# Altium PCB STM32F4.PcbDoc
Units mm, origin at the board's own origin, x right, y up, seen from the top; angles counter-clockwise.
Board outline 80 x 65 mm, 2 copper layers (Top Layer, Bottom Layer); 79 components, 119 nets, 448 pads, 136 vias.
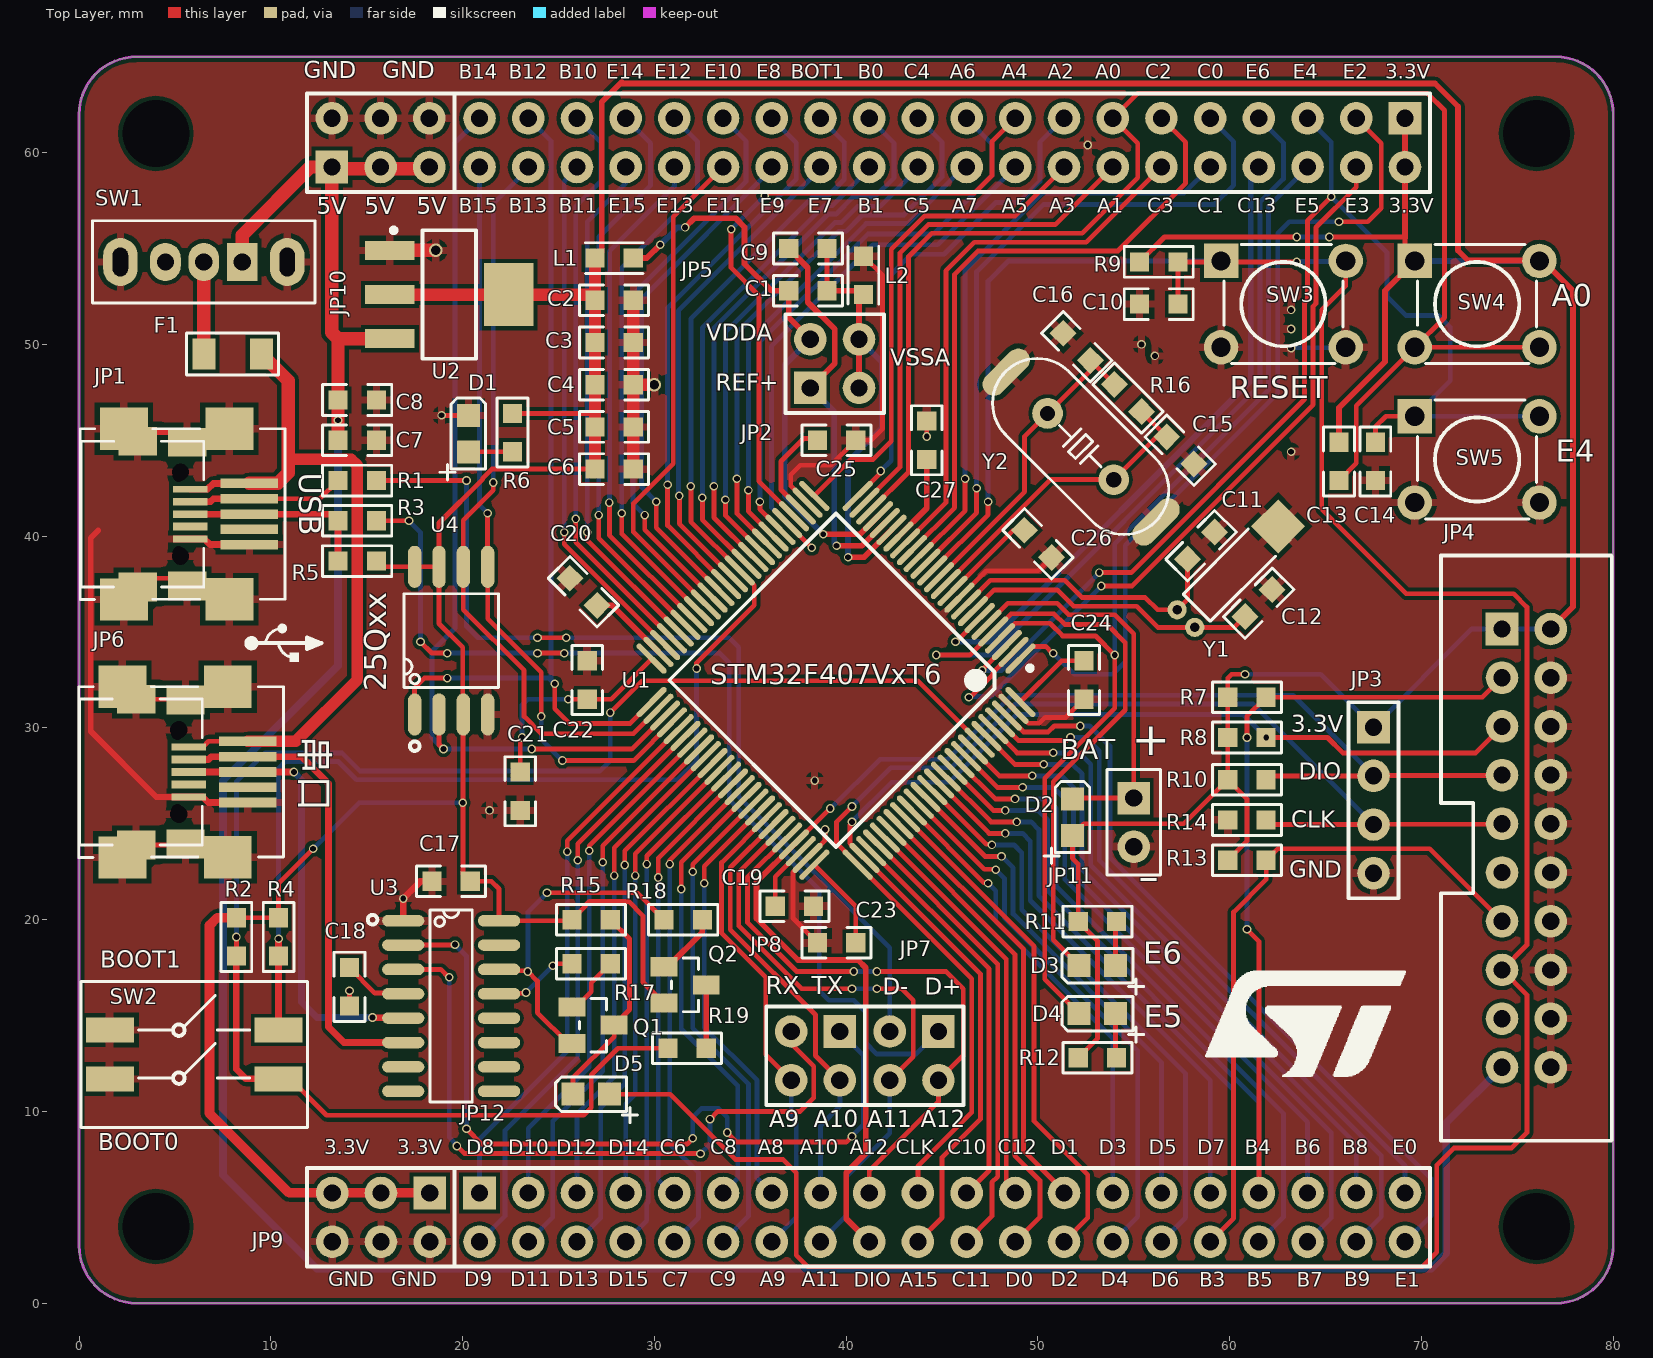
[diagram p0: Top Layer view]
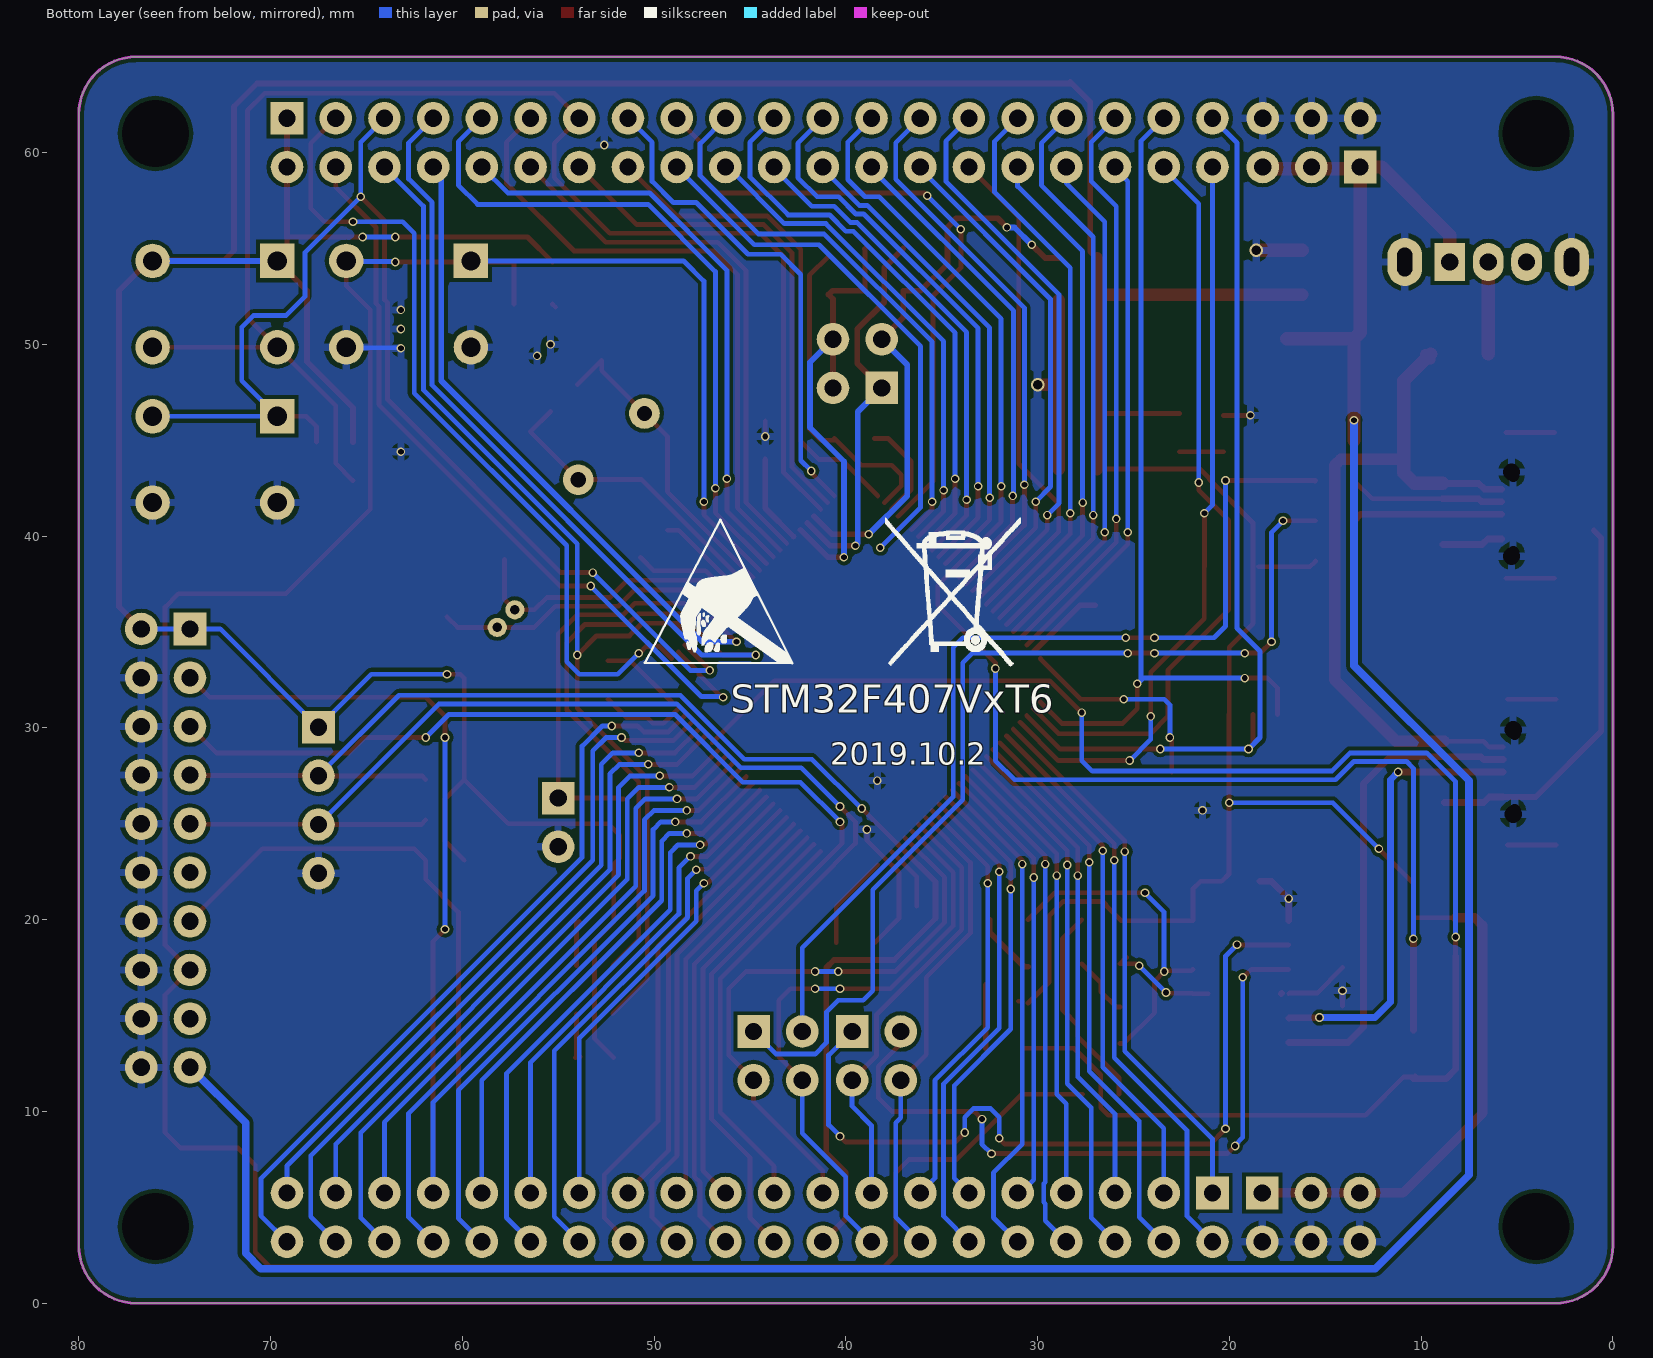
[diagram p1: Bottom Layer view, seen from below]

## Layer stack, top to bottom
Top Solder: solder mask 0.0102, Solder Resist, Dk 3.5
Top Layer: signal copper 0.0356
Dielectric 1: dielectric 0.32, FR-4, Dk 4.8
Bottom Layer: signal copper 0.0356
Bottom Solder: solder mask 0.0102, Solder Resist, Dk 3.5

## Board outline
3,0 cw(c3,3) 0,3 0,62 cw(c3,62) 3,65 77,65 cw(c77,62) 80,62 80,3 cw(c77,3) 77,0

## Design rules (kind name [scope] priority, off if disabled: settings)
Clearance [All] p1: gap=0.2 ignorepadtopadclearanceinfootprint=FALSE
ComponentClearance [All] p1: gap=0 collisioncheckmode=3 verticalgap=0 showdistances=FALSE
HoleSize [All] p1: absolutevalues=TRUE maxlimit=4 minlimit=0.025 maxpercent=80.000 minpercent=20.000
HoleToHoleClearance [All] p1: gap=0 allowstackedmicrovias=TRUE
MinimumSolderMaskSliver [All] p1: minsoldermaskwidth=0
PlaneConnect [All] p1: planeconnectstyle=Direct reliefexpansion=0.508 reliefentries=4 reliefconductorwidth=0.254 reliefairgap=0.254
PolygonConnect [All] p1: connectstyle=Relief reliefconductorwidth=0.4 reliefentries=4 polygonreliefangle="90 Angle" airgapwidth=0.254
RoutingVias [All] p1: holewidth=0.4 width=0.6 viastyle="Through Hole" minholewidth=0.3 minwidth=0.45 maxholewidth=0.5 maxwidth=0.7
SilkToSilkClearance [All] p1: silktosilkclearance=0
SilkToSolderMaskClearance [IsPad] p1: minsilkscreentomaskgap=0 clearancetoexposedcopper=TRUE
SolderMaskExpansion [All] p1: expansion=0.102 istentingtop=FALSE
Width [All] p1: maxlimit=3 minlimit=0.25 preferedwidth=0.3
23 further rules are at their usual default settings.

## Components (designator, comment, footprint, x,y, rotation, side; value= is the part's Value field where it differs from the comment)
C1 "0805c" 0805C 38,52.8 r0 top
C2 "0805c" 0805C 27.9,52.3 r0 top
C3 "0805c" 0805C 27.9,50.1 r0 top
C4 "0805c" 0805C 27.9,47.9 r0 top
C5 "0805c" 0805C 27.9,45.7 r180 top
C6 "0805c" 0805C 27.9,43.5 r180 top
C7 "0805c" 0805C 14.5,45 r0 top
C8 "0805c" 0805C 14.5,47.1 r0 top
C9 "0805c" 0805C 38,55 r0 top
C10 "0805c" 0805C 56.3,52.1 r180 top
C11 "0805c" 0805C 58.507,39.507 r45 top
C12 "0805c" 0805C 61.507,36.507 r45 top
C13 "0805c" 0805C 65.7,43.9 r270 top
C14 "0805c" 0805C 67.6,43.9 r270 top
C15 "0805c" 0805C 57.424,44.472 r315 top
C16 "0805c" 0805C 52.024,49.872 r135 top
C17 "0805c" 0805C 19.4,22 r0 top
C18 "0805c" 0805C 14.1,16.5 r270 top
C19 "0805c" 0805C 37.3,20.7 r0 top
C20 "0805c" 0805C 26.3,37.1 r135 top
C21 "0805c" 0805C 23,26.7 r270 top
C22 "0805c" 0805C 26.5,32.5 r90 top
C23 "0805c" 0805C 39.5,18.8 r180 top
C24 "0805c" 0805C 52.4,32.5 r270 top
C25 "0805c" 0805C 39.5,45 r0 top
C26 "0805c" 0805C 50,39.6 r315 top
C27 "0805c" 0805C 44.2,45 r90 top
D1 "LED" 0805D 20.3,45.35 r90 top
D2 "0805D" 0805D 51.8,25.35 r90 top
D3 "LED" 0805D 53.1,17.6 r180 top
D4 "LED" 0805D 53.1,15.1 r180 top
D5 "0805D" 0805D 26.7,10.9 r180 top
F1 "FUSE" 1206R 8,49.5 r180 top
JP1 "miniusb" MINI_USB 2.33,45.6 r270 top
JP2 "2*2" CON20VP2R54-2X2TM 39.4,49 r0 top
JP3 "SWD" SWD 67.5,26.23 r270 top
JP4 "JTAG" JTAG 74.2,35.16 r90 top
JP5 "IO_1" IO#1 69.14,61.79 r180 top
JP6 "miniusb" MINI_USB 2.25,32.15 r270 top
JP7 "2*2" CON20VP2R54-2X2TM 43.54,12.9 r180 top
JP8 "2*2" CON20VP2R54-2X2TM 38.4,12.9 r180 top
JP9 "PWR3.3V" PWR 18.28,5.75 r180 top
JP10 "PWR5V" PWR 13.18,59.25 r0 top
JP11 "VBAT" VBAT 55,26.34 r270 top
JP12 "IO_2" IO#2 20.88,5.75 r0 top
L1 "0805L" 0805L 27.9,54.5 r0 top
L2 "0805L" 0805L 40.9,53.6 r270 top
Q1 "8050" SOT23-3 26.8,14.5 r270 top
Q2 "8550" SOT23-3 31.6,16.6 r270 top
R1 "0805r" 0805R 14.5,42.9 r0 top
R2 "0805r" 0805R 8.2,19.1 r270 top
R3 "0805r" 0805R 14.5,40.8 r0 top
R4 "0805r" 0805R 10.4,19.1 r270 top
R5 "0805r" 0805R 14.5,38.7 r180 top
R6 "0805r" 0805R 22.6,45.4 r90 top
R7 "0805r" 0805R 60.9,31.6 r0 top
R8 "0805r" 0805R 60.9,29.5 r0 top
R9 "0805r" 0805R 56.3,54.3 r180 top
R10 "0805r" 0805R 60.9,27.3 r0 top
R11 "0805r" 0805R 53.1,19.9 r0 top
R12 "0805r" 0805R 53.1,12.8 r0 top
R13 "0805r" 0805R 60.9,23.1 r0 top
R14 "0805r" 0805R 60.9,25.2 r180 top
R15 "0805r" 0805R 26.7,20 r0 top
R16 "0805r" 0805R 54.693,47.207 r135 top
R17 "0805r" 0805R 26.7,17.7 r180 top
R18 "0805r" 0805R 31.5,20 r180 top
R19 "0805r" 0805R 31.7,13.3 r180 top
SW1 "SWTICH_3P" SWITCH_3P 8.5,54.3 r180 top
SW2 "SW_BOOT" DAIL-SWITCH 1.6,14.24 r270 top
SW3 "KEY" KEY_4P 62.8,52.1 r0 top
SW4 "KEY" KEY_4P 72.9,52.1 r0 top
SW5 "KEY" KEY_4P 72.9,44 r0 top
U1 "STM32F407VxT6" LQFP-100_M 39.469,32.483 r225 top
U2 "ASM1117-3.3" SOT223_N 19.3,52.6 r0 top
U3 "CH340G" SOP16 19.4,15.5 r270 top
U4 "25Q64" SOP8 19.4,33.2 r0 top
Y1 "32.768k" 圆柱晶振2*6 57.257,36.161 r315 top
Y2 "XTAL_49S" XTAL 50.5,46.4 r315 top

## Footprints (in the part's own frame and the unit in brackets; to place one, negate y for a bottom-side part, rotate by r counter-clockwise, add the part's x,y. Pads: shape width x height; smd on the part's side, far side on the other; paste and mask are expansions set on the pad)
0805C [mm]
  rect 1x1 smd: 1(-1,0) 2(1,0)
  silkscreen extent -1.8,-0.8 1.8,0.8
0805D [mm]
  rect 1.2x1.2 smd: 1(-0.95,0) 2(0.95,0)
  silkscreen extent -2.42,-0.9 1.85,1.49
0805L [mm]
  rect 1x1 smd: 1(-1,0) 2(1,0)
  silkscreen extent -1.5,-0.8 1.5,0.8
0805R [mm]
  rect 1x1 smd: 1(-1,0) 2(1,0)
  silkscreen extent -1.8,-0.8 1.8,0.8
1206R [mm]
  rect 1.2x1.6 smd: 1(-1.5,0) 2(1.5,0)
  silkscreen extent -2.4,-1.1 2.4,1.1
CON20VP2R54-2X2TM [mm]
  rect 1.7x1.7 hole 0.9: 1(-1.27,-1.27)
  round 1.7 hole 0.9: 2(-1.27,1.27) 3(1.27,-1.27) 4(1.27,1.27)
  silkscreen extent -2.57,-2.57 2.57,2.57
DAIL-SWITCH [mm]
  rect 1.3x2.5 smd: 1(0,0) 2(0,8.8) 3(2.54,0) 4(2.54,8.8)
  silkscreen extent -2.54,-1.5 5.08,10.3
IO#1 [mm]
  rect 1.7x1.7 hole 0.9: 1(0,0)
  round 1.7 hole 0.9: 2(0,2.54) 3(2.54,0) 4(2.54,2.54) 5(5.08,0) 6(5.08,2.54) 7(7.62,0) 8(7.62,2.54) 9(10.16,0) 10(10.16,2.54) 11(12.7,0) 12(12.7,2.54) 13(15.24,0) 14(15.24,2.54) 15(17.78,0) 16(17.78,2.54) 17(20.32,0) 18(20.32,2.54) 19(22.86,0) 20(22.86,2.54) 21(25.4,0) 22(25.4,2.54) 23(27.94,0) 24(27.94,2.54) 25(30.48,0) 26(30.48,2.54) 27(33.02,0) 28(33.02,2.54) 29(35.56,0) 30(35.56,2.54) 31(38.1,0) 32(38.1,2.54) 33(40.64,0) 34(40.64,2.54) 35(43.18,0) 36(43.18,2.54) 37(45.72,0) 38(45.72,2.54) 39(48.26,0) 40(48.26,2.54)
  silkscreen extent -1.3,-1.3 49.56,3.84
IO#2 [mm]
  rect 1.7x1.7 hole 0.9: 1(0,0)
  round 1.7 hole 0.9: 2(0,-2.54) 3(2.54,0) 4(2.54,-2.54) 5(5.08,0) 6(5.08,-2.54) 7(7.62,0) 8(7.62,-2.54) 9(10.16,0) 10(10.16,-2.54) 11(12.7,0) 12(12.7,-2.54) 13(15.24,0) 14(15.24,-2.54) 15(17.78,0) 16(17.78,-2.54) 17(20.32,0) 18(20.32,-2.54) 19(22.86,0) 20(22.86,-2.54) 21(25.4,0) 22(25.4,-2.54) 23(27.94,0) 24(27.94,-2.54) 25(30.48,0) 26(30.48,-2.54) 27(33.02,0) 28(33.02,-2.54) 29(35.56,0) 30(35.56,-2.54) 31(38.1,0) 32(38.1,-2.54) 33(40.64,0) 34(40.64,-2.54) 35(43.18,0) 36(43.18,-2.54) 37(45.72,0) 38(45.72,-2.54) 39(48.26,0) 40(48.26,-2.54)
  silkscreen extent -1.3,-3.84 49.56,1.3
JTAG [mm]
  rect 1.7x1.7 hole 0.9: 1(0,0)
  round 1.7 hole 0.9: 2(0,-2.54) 3(-2.54,0) 4(-2.54,-2.54) 5(-5.08,0) 6(-5.08,-2.54) 7(-7.62,0) 8(-7.62,-2.54) 9(-10.16,0) 10(-10.16,-2.54) 11(-12.7,0) 12(-12.7,-2.54) 13(-15.24,0) 14(-15.24,-2.54) 15(-17.78,0) 16(-17.78,-2.54) 17(-20.32,0) 18(-20.32,-2.54) 19(-22.86,0) 20(-22.86,-2.54)
  silkscreen extent -26.69,-5.72 3.83,3.19
KEY_4P [mm]
  rect 1.8x1.8 hole 1: 1(-3.25,2.25)
  round 1.8 hole 1: 1(3.25,2.25) 3(-3.25,-2.25) 3(3.25,-2.25)
  silkscreen extent -3.1,-3.1 3.1,3.1
LQFP-100_M [mm] "Thin QFP, 100"
  oval 2.1x0.3 smd: 1(-7.6,6) 2(-7.6,5.5) 3(-7.6,5) 4(-7.6,4.5) 5(-7.6,4) 6(-7.6,3.5) 7(-7.6,3) 8(-7.6,2.5) 9(-7.6,2) 10(-7.6,1.5) 11(-7.6,1) 12(-7.6,0.5) 13(-7.6,0) 14(-7.6,-0.5) 15(-7.6,-1) 16(-7.6,-1.5) 17(-7.6,-2) 18(-7.6,-2.5) 19(-7.6,-3) 20(-7.6,-3.5) 21(-7.6,-4) 22(-7.6,-4.5) 23(-7.6,-5) 24(-7.6,-5.5) 25(-7.6,-6) 51(7.6,-6) 52(7.6,-5.5) 53(7.6,-5) 54(7.6,-4.5) 55(7.6,-4) 56(7.6,-3.5) 57(7.6,-3) 58(7.6,-2.5) 59(7.6,-2) 60(7.6,-1.5) 61(7.6,-1) 62(7.6,-0.5) 63(7.6,0) 64(7.6,0.5) 65(7.6,1) 66(7.6,1.5) 67(7.6,2) 68(7.6,2.5) 69(7.6,3) 70(7.6,3.5) 71(7.6,4) 72(7.6,4.5) 73(7.6,5) 74(7.6,5.5) 75(7.6,6)
  oval 0.3x2.1 smd: 26(-6,-7.6) 27(-5.5,-7.6) 28(-5,-7.6) 29(-4.5,-7.6) 30(-4,-7.6) 31(-3.5,-7.6) 32(-3,-7.6) 33(-2.5,-7.6) 34(-2,-7.6) 35(-1.5,-7.6) 36(-1,-7.6) 37(-0.5,-7.6) 38(0,-7.6) 39(0.5,-7.6) 40(1,-7.6) 41(1.5,-7.6) 42(2,-7.6) 43(2.5,-7.6) 44(3,-7.6) 45(3.5,-7.6) 46(4,-7.6) 47(4.5,-7.6) 48(5,-7.6) 49(5.5,-7.6) 50(6,-7.6) 76(6,7.6) 77(5.5,7.6) 78(5,7.6) 79(4.5,7.6) 80(4,7.6) 81(3.5,7.6) 82(3,7.6) 83(2.5,7.6) 84(2,7.6) 85(1.5,7.6) 86(1,7.6) 87(0.5,7.6) 88(0,7.6) 89(-0.5,7.6) 90(-1,7.6) 91(-1.5,7.6) 92(-2,7.6) 93(-2.5,7.6) 94(-3,7.6) 95(-3.5,7.6) 96(-4,7.6) 97(-4.5,7.6) 98(-5,7.6) 99(-5.5,7.6) 100(-6,7.6)
  silkscreen extent -7.72,-6.15 6.15,6.82, body extent -7,-7 7,7, height 0.8
MINI_USB [mm]
  rect 0.5x3 smd: 1(2.85,6.55) 2(3.65,6.55) 3(4.45,6.55) 4(5.25,6.55) 5(6.04,6.546)
  rect 0.35x1.8 smd: 1(3.15,3.47) 5(5.75,3.47)
  rect 0.4x1.8 smd: 2(3.8,3.47) 3(4.45,3.47) 4(5.1,3.47)
  rect 2.2x2.5 smd: 6(0,5.5) 6(0,0) 6(8.89,5.5) 6(8.9,0)
  rect 1.5x2 smd: 6(0.65,0.72) 6(0.7,3.3) 6(8.2,3.3) 6(8.25,0.72)
  rect 0x0 hole 0.9: 6(2.25,2.95) 6(6.65,2.95)
  rect 0x0 hole 0.65: 6(2.45,2.87) 6(6.45,2.87)
  silkscreen extent 0,-2.27 8.9,8.4
PWR [mm]
  rect 1.7x1.7 hole 0.9: 1(0,0)
  round 1.7 hole 0.9: 2(0,2.54) 3(2.54,0) 4(2.54,2.54) 5(5.08,0) 6(5.08,2.54)
  silkscreen extent -1.3,-1.3 6.4,3.84
SOP8 [mm]
  oval 0.7x2.2 smd: 1(-1.905,-2.5) 2(-0.635,-2.5) 3(0.635,-2.5) 4(1.905,-2.5) 5(1.905,5.2) 6(0.635,5.2) 7(-0.635,5.2) 8(-1.905,5.2)
  silkscreen extent -2.46,-4.4 2.46,3.8
SOP16 [mm]
  oval 0.6x2.2 smd: 1(-4.445,-2.5) 2(-3.175,-2.5) 3(-1.905,-2.5) 4(-0.635,-2.5) 5(0.635,-2.5) 6(1.905,-2.5) 7(3.175,-2.5) 8(4.445,-2.5) 9(4.445,2.5) 10(3.175,2.5) 11(1.905,2.5) 12(0.635,2.5) 13(-0.635,2.5) 14(-1.905,2.5) 15(-3.175,2.5) 16(-4.445,2.5)
  silkscreen extent -5,-4.35 5,1.1
SOT23-3 [mm]
  rect 1x1.4 smd: 1(-0.95,-1.1) 2(0.95,-1.1) 3(0,1.1)
  silkscreen extent -1.4,-0.7 1.4,0.7
SOT223_N [mm]
  rect 2.6x1 smd: 1(-3.1,2.3) 2(-3.1,0) 3(-3.1,-2.3)
  rect 2.6x3.3 smd: 2(3.1,0)
  silkscreen extent -3.02,-3.35 1.4,3.47
SWD [mm]
  rect 1.7x1.7 hole 0.9: 1(-3.81,0)
  round 1.7 hole 0.9: 2(-1.27,0) 3(1.27,0) 4(3.81,0)
  silkscreen extent -5.11,-1.3 5.11,1.3
SWITCH_3P [mm]
  rect 1.6x2 hole 0.9: 1(0,0)
  oval 1.6x2 hole 0.9: 2(2,0) 3(4,0)
  oval 1.8x2.5 hole 1.5 slot 0.8 at 0 deg: 4(-2.35,0) 4(6.35,0)
  silkscreen extent -3.8,-2.15 7.8,2.15
VBAT [mm]
  rect 1.7x1.7 hole 0.9: 1(0,0)
  round 1.7 hole 0.9: 2(2.54,0)
  silkscreen extent -1.5,-1.4 4,1.4
XTAL [mm]
  round 1.6 hole 0.8: 1(0,0) 2(4.88,0)
  oval 1.2x3 smd: 3(-3.048,0) 3(8.001,0)
  silkscreen extent -3.09,-2.33 7.97,2.33
圆柱晶振2*6 [mm]
  round 1 hole 0.5: 1(0,0) 2(1.3,0)
  rect 2x2 smd: 3(0.65,6.8)
  silkscreen extent -0.35,0.8 1.65,5.6

## Part data
SW3 SW4 SW5: library part KEY_4P
Y1: library part 圆柱晶振
C1 C2 C3 C4 C5 C6 C7 C8 C9 C10 C13 C14 C15 C16 C17 C18 C19 C20 C21 C22 C23 C24 C25 C26 C27: =22pF
C11 C12: =10pF
D1: =RED
D2 D5: Parameter 1=IN4148
D3: =BLUE
D4: =GREEN
L1 L2: =4.7uH
R1 R2 R3 R4 R5 R6 R7 R8 R10 R11 R12 R13 R14 R15 R16 R17 R18 R19: =1k
R9: =10k
Y2: =8MHz

## Free pads (board coordinates)
  round 0 hole 3.5: 0(4,4) 0(4,61) 0(76,4) 0(76,61)

## Via types
v1: diameter 0.45, hole 0.3, Top Layer to Bottom Layer, 134 vias
v2: diameter 0.7, hole 0.5, Top Layer to Bottom Layer, 2 vias

## Nets (pads, with @x,y where several pads share a name; then routed paths per layer and width w, separated by ;. In a path a pad name is that pad's centre, name@x,y a point inside that pad or via, vN(x,y) a via of type N, cw(c..) or ccw(c..) an arc to the next point about the centre after c; other vN are vias at no path point)
3.3V: C2.1 C3.1 C4.1 C5.2 C6.2 C13.1 C17.2 D2.1 JP3.1 JP4.1 JP4.2 JP5.1 JP5.2 JP9.1 JP9.3 JP9.5 L1.1 Q2.2 R2.1 R4.1 R5.1 R6.2 R7.1 R8.1 R9.2 R10.1 R11.1 R12.1 R13.1 R15.1 SW4.1 U2.2 U3.16 U4.3 U4.7 U4.8 | length 292.7
  Top Layer w0.25: R2.1 R4.1 10.4,21.9 v1(12.2,23.7) ; R5.1 15.8,38.4 U4.8 U4.7@18.495,38.4 ; U4.3@20,30.735 20,34.2 18.765,35.435 U4.7 18.765,40.687 21.05,42.972 21.05,43.028 21.522,43.5 C6.2 ; U4.3 20.017,30.682 20.017,22.383 C17.2 21.5,22 21.9,21.6 U3.16 25.645,19.945 R15.1 26.423,20.723 26.423,20.773 26.6,20.95 28.65,20.95 29.4,20.2 29.4,16.75 Q2.2 ; R6.2 26.9,46.4 ; Q2.2@30.8,15.75 Q2.2@31,15.75 ; R12.1 53.1,13.8 53.1,18.9 R11.1 52.1,22.9 51.8,23.2 D2.1 52.4,25 57.6,25 R10.1 ; R9.2 56.6,55.6 v1(63.5,55.6) ; R13.1 60.9,24.1 60.9,26.3 R10.1 ; v1(60.8,32.8) 60.1,32.8 59.9,32.6 R7.1 R8.1 R10.1 ; v1@65.3,55.6 69.1,55.6 69.14,55.56 69.14,54.86 SW4.1@69.65,54.35
  Top Layer w0.3: L1.1 27.25,54.85 27.25,62.55 ; 27.25,62.64 28.3,63.69 ; 28.3,63.6 70.7,63.6 71.9,62.4 71.9,54.9 72.425,54.375 76.125,54.375 76.15,54.35 76.35,54.35 77.9,52.8 77.9,36.32 JP4.2 ; C13.1 65.7,46.7 68.1,49.1 68.1,52.8 SW4.1@69.65,54.35 ; 69.14,55.56 JP5.2 JP5.1
  Top Layer w0.5: R2.1 7.2,20.1 6.8,19.7 6.8,9.9 10.95,5.75 JP9.5 JP9.3 JP9.1
  Top Layer w0.65: U2.2@16.2,52.6 22.4,52.6 C2.1@26.9,52.6 ; C6.2 26.9,46.4 C2.1@26.9,52.6 ; L1.1 C2.1@26.9,52.6
  Bottom Layer w0.25: v1(12.2,23.7) 14.6,26.1 v1(20,26.1) ; v1(60.8,32.8) 64.74,32.8 JP3.1 72.62,35.16 JP4.1 JP4.2 ; v1(63.5,55.6) v1(65.2,55.6) v1@65.3,55.6
  Bottom Layer w0.3: SW4.1@69.65,54.35 SW4.1@76.15,54.35
5V: C7.1 C8.1 JP4.19 JP10.1 JP10.3 JP10.5 SW1.1 U2.3 | length 149.3
  Top Layer w0.7: SW1.1 8.5,55.7 12.05,59.25 JP10.1 ; C7.1 v1(13.5,46.05) C8.1 13.5,50.3 ; U2.3@17,50.3 U2.3 13.5,50.3 ; JP10.5@18.26,59.16 13.18,59.16 13.18,51.5 13.18,50.62 13.5,50.3
  Bottom Layer w0.4: v1(13.5,46.05) 13.5,33.242 7.5,27.242 7.5,6.7 12.4,1.8 70.5,1.8 71.3,2.6 71.3,9.4 JP4.19
BOOT0: R2.2 R19.2 SW2.4 U1.94 | length 85.8
  Top Layer w0.25: R2.2 v1(8.2,19.1) ; SW2.4@10.3,11.8 10.9,11.8 12.9,9.8 26.31,9.8 26.7,10.19 26.7,11.9 28.1,13.3 R19.2 ; v1(27.7,30.8) 29.363,32.463 43.731,32.463 U1.94
  Top Layer w0.35: R2.2 8.2,12.2 8.7,11.7 SW2.4 SW2.4@10.3,11.8
  Bottom Layer w0.25: v1(8.2,19.1) 8.2,27.2 9.7,28.7 13.7,28.7 14.65,27.75 27.15,27.75 27.7,28.3 v1(27.7,30.8)
BOOT1: JP5.25 R4.2 SW2.2 U1.37 | length 76.8
  Top Layer w0.25: v1(31.9,42.6) 31.9,40.759 U1.37 34.448,38.197 35.206,37.44 35.206,36.406 32.2,33.4 v1(32.2,33.1)
  Top Layer w0.35: SW2.2 R4.2 v1(10.4,19)
  Bottom Layer w0.25: v1(10.4,19) 10.4,27.9 10.75,28.25 13.514,28.25 14.464,27.3 31.2,27.3 32.2,28.3 v1(32.2,33.1) ; v1(31.9,42.6) 31.9,51.336 38.264,57.7 39,57.7 39.9,58.6 39.9,60.55 JP5.25
CH340_D+: JP6.3 U3.5 | length 23.3
  Top Layer w0.35: JP6.3@5.72,27.7 8.8,27.7 v1(11.2,27.7) ; v1(15.3,14.9) 15.317,14.883 16.882,14.883 U3.5
  Bottom Layer w0.35: v1(11.2,27.7) 11.6,27.3 11.6,15.7 12.4,14.9 v1(15.3,14.9)
CH340_D-: JP6.2 U3.6 | length 24.9
  Top Layer w0.35: JP6.2@5.72,28.35 6.75,28.35 6.9,28.5 8.8,28.5 11.6,28.5 13,27.1 13,14.4 13.805,13.595 U3.6
D+: JP7.1 R3.2 | length 52.9
  Top Layer w0.25: R3.2 v1(17.2,40.8) ; v1(17.8,34.5) 18.4,33.9 v1(19.2,33.9) ; v1(23.9,33.9) v1(25.3,33.9)
  Bottom Layer w0.25: v1(17.2,40.8) 17.8,40.2 v1(17.8,34.5) ; v1(19.2,33.9) v1(23.9,33.9) ; v1(25.3,33.9) 33.4,33.9 33.9,33.4 33.9,26.264 38.6,21.564 38.6,16.3 39.1,15.8 40.4,15.8 41,15.2 41,13.6 41.605,12.995 43.635,12.995 JP7.1
D-: JP7.3 R1.2 | length 50.3
  Top Layer w0.25: R1.2 15.527,42.873 15.554,42.9 v1(20.2,42.9) ; v1(23.9,34.7) v1(25.4,34.7)
  Bottom Layer w0.25: v1(20.2,42.9) 20.2,35.3 20.8,34.7 v1(23.9,34.7) ; v1(25.4,34.7) 33.9,34.7 34.4,34.2 34.4,26.4 42.27,18.53 JP7.3
GND: C2.2 C3.2 C4.2 C5.1 C6.1 C7.2 C8.2 C10.2 C11.2 C12.2 C14.2 C15.2 C16.2 C17.1 C18.2 C19.2 C20.2 C21.2 C22.2 C23.2 C24.2 C25.2 C26.2 C27.2 D1.2 JP1.5 JP1.6 JP3.4 JP4.4 JP4.6 JP4.8 JP4.10 JP4.12 JP4.14 JP4.16 JP4.18 JP4.20 JP6.5 JP6.6 JP9.2 JP9.4 JP9.6 JP10.2 JP10.4 JP10.6 JP11.2 L2.1 R14.2 SW1.4 SW2.1 SW2.3 SW3.3 SW5.3 U1.10 U1.27 U1.74 U1.99 U2.1 U3.1 U4.4 Y1.3 Y2.3 | length 89.7
  Top Layer w0.25: JP6.6@2.97,23.9 JP6.6@5.5,23.9 ; JP6.6@2.97,31.5 JP6.6@5.5,31.5 ; JP1.6@3.05,37.8 JP1.6@5.58,37.8 ; JP1.6@3.05,45.4 JP1.6@5.58,45.4 ; C18.2 v1(14.1,16.3) ; v1(18.9,46.3) D1.2 ; U1.27 37.107,42.623 37.107,43.207 37.6,43.7 39.2,43.7 C25.2 ; C23.2 37.226,20.074 37.226,22.462 U1.74 38.9,24.137 v1(38.9,24.7) ; C25.2@40.6,45.1 C25.2 ; L2.1 41.9,53.6 41.9,45.6 41.3,45 C25.2 ; v1(44.2,45.2) C27.2 ; U1.10 47.299,38.193 50.007,38.193 C26.2 ; U1.99 48.745,30.998 49.503,30.241 50.072,30.241 50.381,30.55 51.45,30.55 C24.2 ; C10.2@55.135,51.935 C10.2 ; SW3.3@60.25,49.85 SW3.3@60.281,49.819
  Top Layer w0.3: 1,40.3 0.6,39.9 0.6,29.825 4.025,26.4 JP6.5@5.72,26.4
  Top Layer w0.35: JP6.5@5.72,26.4 6.445,26.4 6.735,26.11 JP6.5@8.796,26.11 ; JP1.5@5.8,39.85 6.525,39.85 6.815,39.56 JP1.5@8.876,39.56 ; U3.1 v1(16.9,21.1) 17.8,22 C17.1
  Top Layer w0.65: C6.1 C4.2 ; C2.2 C3.2 C4.2 ; v2(30,47.9) C4.2
  Top Layer w0.7: U2.1 v2(18.6,54.9)
  Bottom Layer w0.25: v1(63.2,49.8) 63.225,49.825 66.025,49.825 SW3.3@66.05,49.85 ; SW3.3@66.734,49.834 SW3.3@66.75,49.85
  other v1: 21.4,25.7 38.355,27.255 63.2,44.4 56.1,49.4 55.4,50 63.2,50.8 63.2,51.8 52.6,60.4
NetC11_1: C11.1 U1.9 Y1.1 | length 15
  Top Layer w0.25: U1.9 47.514,37.7 51.4,37.7 52.3,36.8 55.6,36.8 56.239,36.161 Y1.1 57.8,36.704 C11.1
NetC12_1: C12.1 U1.8 Y1.2 | length 15.7
  Top Layer w0.25: U1.8 47.721,37.2 51.007,37.2 51.857,36.35 55.15,36.35 56.258,35.242 Y1.2 60.242,35.242 C12.1
NetC15_1: C15.1 R16.1 U1.12 Y2.2 | length 16
  Top Layer w0.25: U1.12 50.642,42.949 Y2.2 56.45,45.449 56.45,45.45 R16.1
NetC16_1: C16.1 R16.2 U1.13 Y2.1 | length 16.3
  Top Layer w0.25: U1.13 49.3,42.315 49.3,45.2 Y2.1 52.731,48.631 C16.1 52.735,49.165 R16.2
NetC18_1: C18.1 U3.4 | length 3.4
  Top Layer w0.25: C18.1 15.425,16.175 16.86,16.175 U3.4
  Top Layer w0.35: U3.4@17.267,16.167 U3.4@17.3,16.135
NetC19_1: C19.1 U1.73 | length 3.4
  Top Layer w0.25: C19.1 36.3,22.244 U1.73
NetC20_1: C20.1 U1.49 | length 4.2
  Top Layer w0.3: C20.1 27.781,36.393 U1.49
NetC21_1: C21.1 C22.1 U1.50 | length 11.3
  Top Layer w0.25: C21.1 23,29.346 23.1,29.446 v1(23.1,29.5) ; v1(25.5,31.5) C22.1 27.737,31.5 U1.50
  Bottom Layer w0.25: v1(23.1,29.5) 23.1,31.2 23.4,31.5 v1(25.5,31.5)
NetC23_1: C23.1 U1.75 | length 5
  Top Layer w0.25: U1.75 40.5,20.704 C23.1
NetC24_1: C24.1 U1.100 | length 4.2
  Top Layer w0.25: U1.100 51.233,33.5 C24.1
NetC25_1: C25.1 U1.28 | length 5.3
  Top Layer w0.25: U1.28 36.6,42.423 36.6,43.9 37.8,45.1 C25.1@38.5,45.1
NetC26_1: C26.1 U1.11 | length 5.1
  Top Layer w0.25: U1.11 48.707,40.307 C26.1
NetC27_1: C27.1 U1.19 | length 4.6
  Top Layer w0.3: U1.19 44.2,41.457 C27.1
NetD1_1: D1.1 R6.1 | length 2.3
  Top Layer w0.25: D1.1 R6.1
NetD3_1: D3.1 R11.2 | length 2.3
  Top Layer w0.25: R11.2@53.85,19.85 R11.2@53.9,19.9 ; D3.1 R11.2@54.05,19.85
NetD4_1: D4.1 R12.2 | length 2.4
  Top Layer w0.25: R12.2@53.85,12.85 R12.2@53.9,12.8 ; D4.1 54.05,12.85 R12.2
NetD5_2: D5.2 Q1.3 R15.2 | length 10.7
  Top Layer w0.25: D5.2 25.75,11.75 27.9,13.9 Q1.3 28.7,15.3 28.7,19 R15.2
NetF1_2: F1.2 SW1.2 | length 4.8
  Top Layer w0.7: F1.2 SW1.2
NetJP1_2: JP1.2 R1.1 | length 8.2
  Top Layer w0.25: JP1.2@8.88,41.95 12.55,41.95 R1.1
  Top Layer w0.35: JP1.2@5.8,41.8 6.85,41.8 7,41.95 JP1.2@8.88,41.95
NetJP1_3: JP1.3 R3.1 R5.2 | length 9.9
  Top Layer w0.35: JP1.3@5.8,41.15 8.88,41.15 13.15,41.15 R3.1 R5.2
NetQ1_1: Q1.1 R17.1 | length 3.2
  Top Layer w0.25: Q1.1 25.9,15.45 26.7,16.25 26.7,16.7 R17.1
NetQ1_2: Q1.2 R18.2 U3.14 | length 17.6
  Top Layer w0.25: U3.14@21.895,17.4 U3.14 21.967,17.338 23.362,17.338 v1(23.4,17.3) 23.9,16.8 23.9,15.15 25.5,13.55 Q1.2 ; v1(24.4,21.4) 29.1,21.4 R18.2
  Bottom Layer w0.25: v1(23.4,17.3) 23.4,20.4 v1(24.4,21.4)
NetQ2_1: Q2.1 R18.1 | length 3.4
  Top Layer w0.3: Q2.1 30.7,17.55 32.5,19.35 R18.1
NetQ2_3: Q2.3 R19.1 | length 3.3
  Top Layer w0.3: R19.1 Q2.3
NetR17_2: R17.2 U3.13 | length 5.7
  Top Layer w0.25: U3.13@21.1,16.135 U3.13 21.933,16.168 23.267,16.168 v1(23.3,16.2) ; v1(24.7,17.6) 24.725,17.6 24.825,17.7 R17.2 R17.2@25.37,18.03
  Bottom Layer w0.25: v1(23.3,16.2) v1(24.7,17.6)
PA0: C13.2 JP5.13 SW4.3 U1.23 | length 77.6
  Top Layer w0.25: U1.23 43.25,43.336 43.25,54.577 44.473,55.8 52.3,55.8 55.2,58.7 55.2,60.49 JP5.13 55.21,63.1 70.3,63.1 71.2,62.2 71.2,51.4 SW4.3@69.65,49.85 ; C13.2 66.6,43.8 66.6,46.8 SW4.3@69.65,49.85 ; SW4.3@76.15,49.85 SW4.3@69.65,49.85
PA1: JP5.14 U1.24 | length 26.7
  Top Layer w0.25: U1.24 42.8,43.593 42.8,54.764 44.286,56.25 50.9,56.25 JP5.14
PA2: JP5.15 U1.25 | length 25.8
  Top Layer w0.25: U1.25 41.8,43.3 v1(41.8,43.4)
  Bottom Layer w0.25: v1(41.8,43.4) 42.345,43.945 42.345,53.645 43.4,54.7 45.1,54.7 47.8,57.4 49,57.4 50.1,58.5 50.1,60.53 JP5.15
PA3: JP5.16 U1.26 | length 26
  Top Layer w0.25: U1.26 40.237,44 41.4,44 42.35,44.95 42.35,54.95 44.1,56.7 48.81,56.7 JP5.16
PA4: JP5.17 U1.29 | length 34.6
  Top Layer w0.25: v1(34,56) 34,54 35.45,52.55 35.45,42.866 U1.29 ; v1(35.75,57.75) 35.9,57.9 46.7,57.9 47.6,58.8 47.6,60.57 JP5.17
  Bottom Layer w0.25: v1(34,56) v1(35.75,57.75)
PA5: JP5.18 U1.30 | length 29.8
  Top Layer w0.25: U1.30 v1@38.204,39.404
  Bottom Layer w0.25: v1(38.2,39.4) 36.1,41.5 36.1,49.902 41.398,55.2 44.77,55.2 JP5.18
PA6: JP5.19 U1.31 | length 29.6
  Top Layer w0.25: v1(35.5,41.8) 35.5,41.402 U1.31
  Bottom Layer w0.25: v1(35.5,41.8) 35.5,50.127 41.123,55.75 44.55,55.75 47.6,58.8 47.6,60.47 JP5.19 ; JP5.19@46.28,61.61 JP5.19@46.28,61.7
PA7: JP5.20 U1.32 | length 25.8
  Top Layer w0.25: v1(34.9,42.4) 34.9,41.295 U1.32
  Bottom Layer w0.25: v1(34.9,42.4) 34.9,50.164 41.036,56.3 43.2,56.3 46.06,59.16 JP5.20@46.28,59.16
PA8: JP12.13 U1.67 | length 22.6
  Top Layer w0.25: v1(32.6,21.9) 32.6,22.786 U1.67
  Bottom Layer w0.25: v1(32.6,21.9) 32.6,14.373 35.35,11.623 35.35,6.52 JP12.13
PA9: JP8.4 JP12.14 U1.68 | length 25.3
  Top Layer w0.25: U1.68 33.5,22.979 33.5,19.3 35.8,17 35.8,12.96 JP8.4
  Bottom Layer w0.25: JP12.14 37.4,4.49 37.4,9.4 37.13,9.67 JP8.4
PA10: JP8.2 JP12.15 U1.69 | length 23.2
  Top Layer w0.25: U1.69 33.95,22.722 33.95,19.486 38.4,15.036 38.4,12.9 JP8.2
  Bottom Layer w0.25: JP12.15 38.66,9.26 39.67,10.27 JP8.2 ; JP12.15@38.9,6.3 JP12.15@39.12,6.3
PA11: JP7.4 JP12.16 U1.70 | length 31.2
  Top Layer w0.25: U1.70 34.4,22.465 34.4,19.673 37.673,16.4 v1(40.3,16.4) ; v1(41.6,16.4) 42.9,16.4 43.5,15.8 43.5,12.86 JP7.4
  Bottom Layer w0.25: JP12.16 40,4.55 40,6.6 42.27,8.87 JP7.4 ; v1(40.3,16.4) v1(41.6,16.4)
PA12: JP7.2 JP12.17 U1.71 | length 30.7
  Top Layer w0.25: U1.71 34.85,22.208 34.85,19.859 37.409,17.3 v1(40.4,17.3) ; JP12.17 41.2,6.9 44.81,10.51 JP7.2 46.1,12.92 46.1,16.4 45.2,17.3 v1(41.6,17.3)
  Bottom Layer w0.25: v1(40.4,17.3) v1(41.6,17.3) ; JP7.2@44.81,11.58 JP7.2
PA15: JP4.5 JP12.20 R8.2 U1.77 | length 63.7
  Top Layer w0.25: v1(40.3,25.1) 40.3,25.046 40.196,24.942 40.196,23.992 40.954,23.234 U1.77 47,17.174 47,9.6 45,7.6 45,4.47 JP12.20 ; v1(61.9,29.5) 65.1,29.5 65.9,28.7 72.82,28.7 JP4.5
  Bottom Layer w0.25: v1(40.3,25.1) 42.369,27.169 45.369,27.169 48.9,30.7 60.7,30.7 v1(61.9,29.5)
PB0: JP5.23 U1.35 | length 29.1
  Top Layer w0.25: v1(33.1,42.6) 33.1,40.973 U1.35
  Bottom Layer w0.25: v1(33.1,42.6) 33.1,50.836 39.064,56.8 39.476,56.8 40.376,57.7 41.5,57.7 42.5,58.7 42.5,60.49 JP5.23
PB1: JP5.24 U1.36 | length 25.5
  Top Layer w0.25: v1(32.5,42) 32.5,40.866 U1.36
  Bottom Layer w0.25: v1(32.5,42) 32.5,50.873 38.877,57.25 39.29,57.25 JP5.24@41.245,59.205
PB3: JP4.13 JP12.32 R13.2 U1.89 | length 67.4
  Top Layer w0.25: U1.89 47.559,25.1 v1(48.9,25.1) ; JP12.32 60.2,4.43 60.2,20.4 61.9,22.1 R13.2 62.5,23.7 70.42,23.7 JP4.13
  Bottom Layer w0.25: v1(48.9,25.1) 49.65,25.1 50.05,24.7 50.05,21.25 60.2,11.1 60.2,4.43 JP12.32
PB4: JP4.3 JP12.33 R7.2 U1.90 | length 69.2
  Top Layer w0.25: U1.90 47.666,25.7 v1(48.3,25.7) ; v1(60.9,19.5) 61.52,18.88 JP12.33 ; v1(60.9,29.5) 60.9,30.6 R7.2 73.18,31.6 JP4.3
  Bottom Layer w0.25: v1(48.3,25.7) 50,25.7 50.5,25.2 50.5,21.5 61.52,10.48 JP12.33@61.52,5.84 ; v1(60.9,19.5) v1(60.9,29.5)
PB5: JP12.34 U1.91 | length 34.1
  Top Layer w0.25: U1.91 47.773,26.3 v1(48.8,26.3)
  Bottom Layer w0.25: v1(48.8,26.3) 50.45,26.3 50.95,25.8 50.95,21.75 62.8,9.9 62.8,4.49 JP12.34
PB6: JP12.35 U1.92 | length 31.8
  Top Layer w0.25: U1.92 47.88,26.9 v1(49.2,26.9)
  Bottom Layer w0.25: v1(49.2,26.9) 50.8,26.9 51.4,26.3 51.4,22.1 64.06,9.44 JP12.35@64.06,5.84
PB7: JP12.36 U1.93 | length 35.8
  Top Layer w0.25: U1.93 47.988,27.5 v1(49.7,27.5)
  Bottom Layer w0.25: v1(49.7,27.5) 51.25,27.5 51.85,26.9 51.85,22.35 65.3,8.9 65.3,4.45 JP12.36
PB8: JP12.37 U1.95 | length 33.5
  Top Layer w0.25: U1.95 48.802,28.1 v1(50.3,28.1)
  Bottom Layer w0.25: v1(50.3,28.1) 51.8,28.1 52.3,27.6 52.3,22.6 66.6,8.3 JP12.37@66.6,5.84
PB9: JP12.38 U1.96 | length 37.5
  Top Layer w0.25: U1.96 48.909,28.7 v1(50.8,28.7)
  Bottom Layer w0.25: v1(50.8,28.7) 52.15,28.7 52.75,28.1 52.75,22.85 67.9,7.7 67.9,4.51 JP12.38
PB10: JP5.35 U1.47 | length 30.2
  Top Layer w0.25: v1(25.9,40.9) 25.9,39.688 U1.47
  Bottom Layer w0.25: v1(25.9,40.9) 25.9,57.196 27.2,58.496 27.2,60.55 JP5.35
PB11: JP5.36 U1.48 | length 27.4
  Top Layer w0.25: v1(25.3,40.2) 25.3,39.581 U1.48
  Bottom Layer w0.25: v1(25.3,40.2) 25.3,58.5 25.96,59.16 JP5.36
PB12: JP5.37 U1.51 U4.1 | length 46
  Top Layer w0.25: U4.1 17.495,32.095 18,32.6 v1(19.2,32.6) ; v1(24.8,32.3) 24.8,31 25.575,30.225 28.725,30.225 U1.51
  Bottom Layer w0.25: v1(19.2,32.6) 24.5,32.6 24.6,32.5 ; JP5.37 24.6,60.61 24.6,32.5 ; v1(24.8,32.3) 24.6,32.5
PB13: JP5.38 U1.52 U4.6 | length 39.2
  Top Layer w0.25: v1(21.6,42.8) 21.6,42.4 20.035,40.835 U4.6 20.035,36.165 23.2,33 23.2,30.6 24.1,29.7 28.907,29.7 U1.52
  Bottom Layer w0.25: v1(21.6,42.8) 21.6,57.34 JP5.38@23.42,59.16
PB14: JP5.39 U1.53 U4.2 | length 48.3
  Top Layer w0.25: U4.2 18.765,29.135 v1(19,28.9) ; v1(23.6,28.9) 28.814,28.9 U1.53
  Bottom Layer w0.25: JP5.39 19.6,60.51 19.6,35.2 18.4,34 18.4,29.5 v1(19,28.9) v1(23.6,28.9)
PB15: JP5.40 U1.54 U4.5 | length 39.3
  Top Layer w0.25: v1(21.3,41.2) 21.303,41.197 21.303,38.403 U4.5 21.305,35.695 24.1,32.9 v1(24.1,30.6) ; v1(25.2,28.3) 28.921,28.3 U1.54
  Bottom Layer w0.25: JP5.40 20.88,41.62 v1(21.3,41.2) ; v1(24.1,30.6) 24.1,29.4 v1(25.2,28.3)
PC0: JP5.9 U1.15 | length 35.6
  Top Layer w0.25: U1.15 46.8,41.229 v1(46.8,42.5)
  Bottom Layer w0.25: v1(46.8,42.5) 46.8,53.8 50.3,57.3 59.2,57.3 60.2,58.3 60.2,60.57 JP5.9
PC1: JP5.10 U1.16 | length 31
  Top Layer w0.25: U1.16 46.2,41.336 v1(46.2,43)
  Bottom Layer w0.25: v1(46.2,43) 46.2,53.864 50.236,57.9 57.63,57.9 JP5.10
PC2: JP5.11 U1.17 | length 33.2
  Top Layer w0.25: U1.17 45.65,41.493 45.65,53.65 46.875,54.875 54.175,54.875 57.7,58.4 57.7,60.53 JP5.11
PC3: JP5.12 U1.18 | length 28.6
  Top Layer w0.25: U1.18 45.2,41.75 45.2,53.836 46.689,55.325 52.515,55.325 JP5.12
PC4: JP5.21 U1.33 | length 29.3
  Top Layer w0.25: v1(34.3,43) 34.3,41.188 U1.33
  Bottom Layer w0.25: v1(34.3,43) 34.3,50.6 39.6,55.9 40,55.9 40.85,56.75 43.014,56.75 45,58.736 45,60.53 JP5.21
PC5: JP5.22 U1.34 | length 25.7
  Top Layer w0.25: v1(33.7,41.9) 33.7,41.08 U1.34
  Bottom Layer w0.25: v1(33.7,41.9) 33.7,50.636 39.414,56.35 39.75,56.35 40.6,57.2 41.78,57.2 JP5.22@43.74,59.16
PC6: JP12.9 U1.63 | length 23.3
  Top Layer w0.25: v1(30.2,22.2) 30.2,23.215 U1.63
  Bottom Layer w0.25: v1(30.2,22.2) 30.2,6.45 JP12.9@30.9,5.75
PC7: JP12.10 U1.64 | length 26.2
  Top Layer w0.25: v1(30.8,22.9) 30.8,23.108 U1.64
  Bottom Layer w0.25: v1(30.8,22.9) 30.8,8.3 32.3,6.8 32.3,4.47 JP12.10
PC8: JP12.11 U1.65 | length 23.6
  Top Layer w0.25: v1(31.4,21.6) 31.4,23.001 U1.65
  Bottom Layer w0.25: v1(31.4,21.6) 31.4,14.3 34.35,11.35 34.35,6.52 JP12.11
PC9: JP12.12 U1.66 | length 25.9
  Top Layer w0.25: v1(32,22.5) 32,22.893 U1.66
  Bottom Layer w0.25: v1(32,22.5) 32,14.336 34.9,11.436 34.9,4.53 JP12.12
PC10: JP12.21 U1.78 | length 20.9
  Top Layer w0.25: U1.78 47.45,17.431 47.45,6.92 JP12.21
PC11: JP12.22 U1.79 | length 24
  Top Layer w0.25: U1.79 47.9,17.688 47.9,6.6 47.6,6.3 47.6,4.53 JP12.22
PC12: JP12.23 U1.80 | length 21.3
  Top Layer w0.25: U1.80 48.35,17.945 48.35,6.22 JP12.23
PC13: JP5.8 U1.7 | length 34.1
  Top Layer w0.25: v1(45.7,34.5) 45.728,34.5 U1.7
  Bottom Layer w0.3: v1(45.7,34.5) 47.5,34.5 61.1,48.1 61.1,58.83 JP5.8
PD0: JP12.24 U1.81 | length 25.2
  Top Layer w0.25: U1.81 48.8,18.202 48.8,7.7 50.1,6.4 50.1,4.49 JP12.24
PD1: JP12.25 U1.82 | length 21.9
  Top Layer w0.25: U1.82 49.25,18.459 49.25,7.95 50.8,6.4
PD2: JP12.26 U1.83 | length 26.6
  Top Layer w0.25: U1.83 49.8,18.616 49.8,9.5 52.6,6.7 52.6,4.45 JP12.26
PD3: JP12.27 U1.84 | length 24.3
  Top Layer w0.25: U1.84 47.185,21.938 47.362,21.938 v1(47.4,21.9)
  Bottom Layer w0.25: v1(47.4,21.9) 47.8,21.5 47.8,19.927 53.9,13.827 JP12.27@53.9,5.84
PD4: JP12.28 U1.85 | length 28.4
  Top Layer w0.25: U1.85 47.2,22.631 47.769,22.631 v1(47.8,22.6)
  Bottom Layer w0.25: v1(47.8,22.6) 48.25,22.15 48.25,20.114 55.2,13.164 55.2,4.51 JP12.28
PD5: JP12.29 U1.86 | length 26.2
  Top Layer w0.25: U1.86 47.238,23.3 v1(48.1,23.3)
  Bottom Layer w0.25: v1(48.1,23.3) 48.7,22.7 48.7,20.3 56.44,12.56 JP12.29@56.44,5.84
PD6: JP12.30 U1.87 | length 30.4
  Top Layer w0.25: U1.87 47.307,23.938 47.562,23.938 v1(47.6,23.9)
  Bottom Layer w0.25: v1(47.6,23.9) 48.75,23.9 49.15,23.5 49.15,20.522 57.7,11.972 57.7,4.47 JP12.30
PD7: JP12.31 U1.88 | length 28.1
  Top Layer w0.25: U1.88 47.452,24.5 v1(48.3,24.5)
  Bottom Layer w0.25: v1(48.3,24.5) 49.2,24.5 49.6,24.1 49.6,21 58.98,11.62 JP12.31@58.98,5.84
PD8: JP12.1 U1.55 | length 28.5
  Top Layer w0.25: v1(25.45,23.55) 25.45,24.122 U1.55
  Bottom Layer w0.25: JP12.1 20.88,8.58 25.45,13.15 v1(25.45,23.55)
PD9: JP12.2 U1.56 | length 30.8
  Top Layer w0.25: v1(26,23.1) 26,23.964 U1.56
  Bottom Layer w0.25: JP12.2 22.2,4.53 22.2,9 26,12.8 v1(26,23.1)
PD10: JP12.3 U1.57 | length 27
  Top Layer w0.25: v1(26.6,23.6) 26.6,23.857 U1.57
  Bottom Layer w0.25: JP12.3 23.42,9.12 26.6,12.3 v1(26.6,23.6)
PD11: JP12.4 U1.58 | length 29.4
  Top Layer w0.25: v1(27.3,23) 27.3,23.85 U1.58
  Bottom Layer w0.25: JP12.4 24.7,4.49 24.7,9.5 27.3,12.1 v1(27.3,23)
PD12: JP12.5 U1.59 | length 25.6
  Top Layer w0.25: v1(27.9,22.3) 27.9,23.743 U1.59
  Bottom Layer w0.25: JP12.5 25.96,9.86 27.9,11.8 v1(27.9,22.3)
PD13: JP12.6 U1.60 | length 27.9
  Top Layer w0.25: v1(28.45,22.85) 28.45,23.586 U1.60
  Bottom Layer w0.25: JP12.6 27.2,4.45 27.2,10.2 28.45,11.45 v1(28.45,22.85)
PD14: JP12.7 U1.61 | length 24.1
  Top Layer w0.25: v1(29,22.3) 29,23.429 U1.61
  Bottom Layer w0.25: JP12.7 28.5,10.4 29,10.9 v1(29,22.3)
PD15: JP12.8 U1.62 | length 26.5
  Top Layer w0.25: v1(29.6,22.9) 29.6,23.322 U1.62
  Bottom Layer w0.25: JP12.8 29.6,4.31 29.6,5.188 29.675,5.263 29.675,6.237 29.6,6.312 v1(29.6,22.9)
PE0: JP12.39 U1.97 | length 35.6
  Top Layer w0.25: U1.97 48.038,30.291 48.989,29.341 51.486,29.341 51.646,29.5 v1(51.7,29.5)
  Bottom Layer w0.25: v1(51.7,29.5) 52.5,29.5 53.2,28.8 53.2,23.1 69.14,7.16 JP12.39
PE1: JP12.40 U1.98 | length 39.6
  Top Layer w0.25: U1.98 48.392,30.645 49.246,29.791 50.541,29.791 50.851,30.1 v1(52.2,30.1)
  Bottom Layer w0.25: v1(52.2,30.1) 52.7,30.1 53.75,29.05 53.75,23.25 70.5,6.5 70.5,4.57 JP12.40
PE2: JP5.3 U1.1 | length 43.4
  Top Layer w0.25: U1.1 49.722,34.251 50.395,34.251 50.746,33.9 v1(50.8,33.9) ; v1(65.7,56.4) 67.2,56.4 67.9,57.1 67.9,60.49 JP5.3
  Bottom Layer w0.25: v1(50.8,33.9) 51.9,32.8 53.9,32.8 54.55,33.45 54.55,39.514 62.5,47.464 62.5,55.8 63.1,56.4 v1(65.7,56.4)
PE3: JP5.4 U1.2 | length 40.9
  Top Layer w0.25: v1(46.4,31.6) 46.478,31.6 47.65,32.772 47.65,32.873 48.732,33.955 U1.2 ; v1(53.3,37.4) 54.9,37.4 64.35,46.85 64.35,51.986 64.5,52.136 64.5,56.1 66.6,58.2 JP5.4@66.6,59.16
  Bottom Layer w0.25: v1(46.4,31.6) 46.438,31.638 47.538,31.638 v1(53.3,37.4)
PE4: C14.1 JP5.5 SW5.1 U1.3 | length 65.6
  Top Layer w0.25: v1(47.1,33) 47.1,33.044 U1.3 ; v1(53.2,38.1) 54.864,38.1 63.9,47.136 63.9,52.173 64.05,52.323 64.05,56.45 v1(65.3,57.7) ; C14.1 67.6,45.7 68.15,46.25 SW5.1@69.65,46.25
  Bottom Layer w0.25: v1(47.1,33) 48.1,33 v1(53.2,38.1) ; JP5.5 65.3,60.55 v1(65.3,57.7) 68.2,54.8 68.2,52.5 69.2,51.5 70.9,51.5 71.5,50.9 71.5,48.1 69.65,46.25 SW5.1@76.15,46.25
PE5: D4.2 JP5.6 U1.4 | length 57.6
  Top Layer w0.25: U1.4 48.807,35.458 50.628,35.458 51.286,34.8 53,34.8 v1(54,33.8) 54,31.022 50.35,27.372 50.35,16.9 D4.2
  Bottom Layer w0.25: v1(54,33.8) 54,39.6 62.025,47.625 62.025,57.215 JP5.6
PE6: D3.2 JP5.7 U1.5 | length 68
  Top Layer w0.25: v1(44.7,33.8) 46.442,33.8 U1.5 48.6,35.958 50.835,35.958 51.393,35.4 53.6,35.4 54.55,34.45 54.55,30.936 50.8,27.186 50.8,18.95 D3.2
  Bottom Layer w0.25: v1(44.7,33.8) 47.5,33.8 61.575,47.875 61.575,57.401 62.8,58.626 62.8,60.51 JP5.7
PE7: JP5.26 U1.38 | length 25.6
  Top Layer w0.25: v1(31.3,42.1) 31.3,40.652 U1.38
  Bottom Layer w0.25: v1(31.3,42.1) 31.25,42.15 31.25,51.75 JP5.26@38.66,59.16
PE8: JP5.27 U1.39 | length 28.9
  Top Layer w0.25: v1(30.688,42.688) 30.688,40.557 U1.39
  Bottom Layer w0.25: v1(30.688,42.688) 30.688,51.91 37.4,58.622 37.4,60.51 JP5.27
PE9: JP5.28 U1.40 | length 26.6
  Top Layer w0.25: v1(30.1,41.8) 30.1,40.438 U1.40
  Bottom Layer w0.25: v1@30.162,41.8 v1(30.1,41.8) 29.325,42.575 29.325,52.365 JP5.28@36.165,59.205
PE10: JP5.29 U1.41 | length 29.7
  Top Layer w0.25: v1(29.5,41.1) 29.5,40.331 U1.41
  Bottom Layer w0.25: v1(29.5,41.1) 28.875,41.725 28.875,52.597 34.78,58.502 34.78,60.59 JP5.29
PE11: JP5.30 U1.42 | length 26.4
  Top Layer w0.25: U1.42 28.9,40.224 28.9,41.7 30.979,43.779 30.979,56.649 JP5.30@33.49,59.16 ; JP5.30@33.482,59.16 JP5.30@33.49,59.16 ; JP5.30@33.58,59.16 JP5.30@33.49,59.16 ; JP5.30 JP5.30@33.49,59.16
PE12: JP5.31 U1.43 | length 29.5
  Top Layer w0.25: v1(28.3,41.2) 28.3,40.116 U1.43
  Bottom Layer w0.25: v1(28.3,41.2) 28.3,54 32.24,57.94 32.24,60.59 JP5.31
PE13: JP5.32 U1.44 | length 27.1
  Top Layer w0.25: v1(27.65,41.75) 27.65,40.059 U1.44
  Bottom Layer w0.25: v1(27.65,41.75) 27.65,54.85 31.04,58.24 31.04,59.16 JP5.32@31.4,58.8
PE14: JP5.33 U1.45 | length 29.9
  Top Layer w0.25: v1(27.1,41.1) 27.1,39.902 U1.45
  Bottom Layer w0.25: v1(27.1,41.1) 27.1,55.6 29.8,58.3 29.8,60.49 JP5.33
PE15: JP5.34 U1.46 | length 27
  Top Layer w0.25: v1(26.5,40.2) 26.5,39.795 U1.46
  Bottom Layer w0.25: v1(26.5,40.2) 26.5,56.4 28.5,58.4 JP5.34
RESET: C10.1 D5.1 JP4.15 R9.1 SW3.1 U1.14 | length 156.2
  Top Layer w0.25: D5.1 30.822,10.9 34.222,7.5 36.7,7.5 37.4,6.8 37.4,2.5 38,1.9 70.031,1.9 70.8,2.669 70.8,7.2 71.7,8.1 74.7,8.1 75.5,8.9 75.5,16.08 JP4.15 75.5,18.68 75.5,36.3 74.8,37 69.2,37 64.8,41.4 64.8,51.8 66.05,53.05 SW3.1@66.05,54.35 ; U1.14 47.4,41.122 v1(47.4,41.8) ; C10.1 R9.1 60.2,54.3 60.25,54.35 60.3,54.3 v1(63.5,54.3) ; SW3.1@66.25,53.85 SW3.1@66.75,54.35
  Bottom Layer w0.25: v1(47.4,41.8) 47.4,53.3 48.45,54.35 59.55,54.35 SW3.1@60.05,54.35 ; v1(63.5,54.3) 63.525,54.325 66.025,54.325 66.05,54.35 SW3.1@66.75,54.35
RX: JP8.3 U3.3 | length 36.2
  Top Layer w0.25: U3.3 18.856,17.405 19.261,17 v1(19.3,17) ; v1(19.7,8.2) 20.1,7.8 v1(32.4,7.8) ; v1(32.9,9.6) 33.3,10 37.6,10 38.305,10.705 38.305,12.359 37.1,13.564 37.13,13.594 JP8.3
  Bottom Layer w0.25: v1(19.3,17) 19.3,8.649 19.7,8.249 v1(19.7,8.2) ; v1(32.4,7.8) 32.9,8.3 v1(32.9,9.6)
SWCLK: JP3.3 JP4.9 JP12.19 R14.1 U1.76 | length 68.9
  Top Layer w0.25: v1(40.3,25.9) 39.5,25.1 39.5,23.98 40.6,22.88 U1.76 46.55,16.917 46.55,9.95 43.74,7.14 JP12.19@43.74,5.84 ; R14.1 62.14,24.96 JP3.3 67.52,24.98 74.18,24.98 JP4.9
  Bottom Layer w0.25: v1(40.3,25.9) 42.319,27.919 45.483,27.919 48.814,31.25 61.21,31.25 JP3.3
SWDIO: JP3.2 JP4.7 JP12.18 R10.2 U1.72 | length 74.2
  Top Layer w0.25: U1.72@37.29,23.927 v1(39.163,25.8) ; R10.2 62.1,27.5 JP3.2 67.52,27.52 74.18,27.52 JP4.7
  Top Layer w0.3: U1.72 35.325,21.976 35.325,20.056 37.481,17.9 40.613,17.9 41.025,17.488 41.025,7.825 40,6.8 40,4.41 JP12.18
  Bottom Layer w0.25: v1(39.163,25.8) 39.2,25.8 41.769,28.369 45.296,28.369 48.627,31.7 63.3,31.7 JP3.2
TX: JP8.1 U3.2 | length 41.9
  Top Layer w0.25: U3.2 16.913,18.688 19.587,18.688 v1(19.6,18.7) ; v1(20.2,9.1) 21,8.3 31.7,8.3 v1(32,8.6) ; v1(33.8,8.9) 34.3,8.4 40,8.4 v1(40.3,8.7)
  Bottom Layer w0.25: v1(19.6,18.7) 20.2,18.1 v1(20.2,9.1) ; v1(32,8.6) 32,9.7 32.45,10.15 33.35,10.15 33.8,9.7 v1(33.8,8.9) ; JP8.1 40.9,12.94 40.9,9.3 v1(40.3,8.7)
VBAT: D2.2 JP11.1 U1.6 | length 20.8
  Top Layer w0.25: U1.6 48.435,36.5 51,36.5 51.6,35.9 54,35.9 55,34.9 JP11.1 51.84,26.34 D2.2 D2.2@51.6,26.3
VCC: F1.1 JP1.1 JP6.1 | length 37.8
  Top Layer w0.25: JP6.1@5.72,29 6.445,29 6.745,29.3 JP6.1@8.8,29.3
  Top Layer w0.35: JP1.1@5.8,42.45 6.7,42.45 7,42.75 JP1.1@8.88,42.75
  Top Layer w0.5: F1.1@9.5,49.2 9.725,49.425 F1.1@9.8,49.5
  Top Layer w0.6: JP6.1@8.8,29.3 11.3,29.3 14.5,32.5 14.5,43.7 14.2,44 10.9,44
  Top Layer w0.7: JP1.1@8.88,42.75 10.35,42.75 10.9,43.3 10.9,44 10.9,48.1 9.65,49.35 F1.1
VDDA: C1.1 JP2.2 L1.2 U1.22 | length 29.4
  Top Layer w0.3: L1.2 29.6,54.5 v1(30.3,55.2) ; v1(31.6,56.1) 32.075,56.575 34.238,56.575 34.7,56.113 34.7,54.2 36.1,52.8 C1.1 37,51.4 JP2.2 ; v1(38.8,40.1) 40.721,40.1 U1.22
  Bottom Layer w0.3: v1(30.3,55.2) 31.2,56.1 v1(31.6,56.1) ; JP2.2 36.8,48.94 36.8,42.1 v1(38.8,40.1)
VREF+: C9.1 JP2.1 U1.21 | length 20.6
  Top Layer w0.3: C9.1 38,54 38,52.2 39.4,50.8 39.4,49 JP2.1 ; v1(39.5,39.5) 40.828,39.5 U1.21
  Bottom Layer w0.3: JP2.1 39.375,46.485 39.375,39.625 v1(39.5,39.5)
VSSA: C1.2 C9.2 JP2.3 JP2.4 L2.2 U1.20 | length 25.2
  Top Layer w0.25: C1.2 C9.2 C9.2@39.025,54.975
  Top Layer w0.3: C1.2 40.7,52.8 L2.2 40.67,52.37 JP2.4 JP2.3 ; v1(40.1,38.9) 40.936,38.9 U1.20 ; JP2.4@40.6,50.34 JP2.4@40.6,50.9
  Bottom Layer w0.3: v1(40.1,38.9) 40.1,43.9 41.87,45.67 41.87,49.07 JP2.4
pads on no net: JP1.4 JP4.11 JP4.17 JP6.4 SW1.3 U3.7 U3.8 U3.9 U3.10 U3.11 U3.12 U3.15

## Polygon pours and split planes (outlines as drawn)
GND on Top Layer "`" (solid, remove dead copper, pour order 0): 0,0 80,0 80,65 0,65
GND on Bottom Layer "`" (solid, remove dead copper, pour order 2): 0,0 80,0 80,65 0,65

## Keep-outs
Keep-Out Layer:
  the board outline again, w0.15

## Silkscreen, mask and mechanical layers (free items; w line width, h text height)
Top Overlay:
  drawing of 320 lines, arcs and shapes, not listed
  text "E14" at 27.5,63.6 h1.3
  text "A4" at 48.1,63.6 h1.3
  text "A2" at 50.5,63.6 h1.3
  text "A0" at 53,63.6 h1.3
  text "C2" at 55.6,63.6 h1.3
  text "C0" at 58.3,63.6 h1.3
  text "E6" at 60.8,63.6 h1.3
  text "E4" at 63.3,63.6 h1.3
  text "E2" at 65.9,63.6 h1.3
  text "3.3V" at 68.1,63.6 h1.3
  text "GND" at 11.7,63.58 h1.5
  text "GND" at 15.8,63.58 h1.5
  text "B14" at 19.8,63.58 h1.3
  text "B12" at 22.4,63.58 h1.3
  text "B10" at 25,63.58 h1.3
  text "E12" at 30,63.58 h1.3
  text "E10" at 32.6,63.58 h1.3
  text "E8" at 35.3,63.58 h1.3
  text "BOT1" at 37.1,63.58 h1.3
  text "B0" at 40.6,63.58 h1.3
  text "C4" at 43,63.58 h1.3
  text "A6" at 45.4,63.58 h1.3
  text "B15" at 19.8,56.6 h1.3
  text "B13" at 22.4,56.6 h1.3
  text "B11" at 25,56.6 h1.3
  text "E15" at 27.6,56.6 h1.3
  text "E13" at 30.1,56.6 h1.3
  text "E11" at 32.7,56.6 h1.3
  text "E9" at 35.5,56.6 h1.3
  text "E7" at 38,56.6 h1.3
  text "B1" at 40.6,56.6 h1.3
  text "C5" at 43,56.6 h1.3
  text "A7" at 45.5,56.6 h1.3
  text "A5" at 48.1,56.6 h1.3
  text "A3" at 50.6,56.6 h1.3
  text "A1" at 53.1,56.6 h1.3
  text "C3" at 55.7,56.6 h1.3
  text "C1" at 58.3,56.6 h1.3
  text "C13" at 60.4,56.6 h1.3
  text "E5" at 63.4,56.6 h1.3
  text "E3" at 66,56.6 h1.3
  text "3.3V" at 68.3,56.6 h1.3
  text "5V" at 12.4,56.5 h1.5
  text "5V" at 14.9,56.5 h1.5
  text "5V" at 17.6,56.5 h1.5
  text "A0" at 76.8,51.6 h2
  text "VDDA" at 32.7,49.9 h1.5
  text "VSSA" at 42.3,48.6 h1.5
  text "REF+" at 33.2,47.3 h1.5
  text "RESET" at 60,46.8 h2
  text "E4" at 77,43.5 h2
  text "USB" at 11.1,43.3 h2 r270
  text "25Qxx" at 16.4,31.9 h2 r90
  text "STM32F407VxT6" at 32.9,31.9 h1.8
  text "串口" at 11.1,29.6 h2.5 r270
  text "3.3V" at 63.2,29.5 h1.5
  text "BAT" at 51.2,28 h1.8
  text "+" at 54.9,28 h3
  text "DIO" at 63.6,27 h1.5
  text "CLK" at 63.2,24.5 h1.5
  text "GND" at 63.1,21.9 h1.5
  text "-" at 55.2,20.5 h4
  text "E6" at 55.5,17.3 h2
  text "BOOT1" at 1.1,17.2 h1.5
  text "RX" at 35.8,15.8 h1.6
  text "TX" at 38.2,15.8 h1.6
  text "D-" at 41.9,15.8 h1.5
  text "D+" at 44.1,15.8 h1.5
  text "E5" at 55.52,14.01 h2
  text "A9" at 36,8.9 h1.5
  text "A10" at 38.3,8.9 h1.5
  text "A11" at 41.1,8.9 h1.5
  text "A12" at 43.9,8.9 h1.5
  text "BOOT0" at 1,7.7 h1.5
  text "3.3V" at 12.78,7.51 h1.3
  text "3.3V" at 16.58,7.51 h1.3
  text "D8" at 20.18,7.51 h1.3
  text "D10" at 22.38,7.51 h1.3
  text "D12" at 24.88,7.51 h1.3
  text "C6" at 30.28,7.51 h1.3
  text "A8" at 35.38,7.51 h1.3
  text "A10" at 37.58,7.51 h1.3
  text "A12" at 40.18,7.51 h1.3
  text "CLK" at 42.58,7.51 h1.3
  text "C10" at 45.28,7.51 h1.3
  text "D1" at 50.68,7.51 h1.3
  text "D3" at 53.18,7.51 h1.3
  text "D5" at 55.78,7.51 h1.3
  text "D7" at 58.3,7.51 h1.3
  text "B4" at 60.78,7.51 h1.3
  text "B6" at 63.38,7.51 h1.3
  text "B8" at 65.88,7.51 h1.3
  text "E0" at 68.48,7.51 h1.3
  text "D14" at 27.6,7.5 h1.3
  text "C8" at 32.9,7.5 h1.3
  text "C12" at 47.9,7.5 h1.3
  text "GND" at 12.98,0.62 h1.3
  text "GND" at 16.28,0.62 h1.3
  text "D9" at 20.08,0.62 h1.3
  text "D11" at 22.48,0.62 h1.3
  text "D13" at 24.98,0.62 h1.3
  text "D15" at 27.58,0.62 h1.3
  text "C7" at 30.4,0.6 h1.3
  text "C9" at 32.88,0.62 h1.3
  text "A9" at 35.48,0.62 h1.3
  text "A11" at 37.68,0.62 h1.3
  text "DIO" at 40.4,0.6 h1.3
  text "A15" at 42.8,0.6 h1.3
  text "C11" at 45.5,0.6 h1.3
  text "D0" at 48.3,0.6 h1.3
  text "D2" at 50.68,0.62 h1.3
  text "D4" at 53.28,0.62 h1.3
  text "D6" at 55.9,0.6 h1.3
  text "B3" at 58.4,0.6 h1.3
  text "B5" at 60.9,0.6 h1.3
  text "B7" at 63.5,0.6 h1.3
  text "B9" at 65.98,0.62 h1.3
  text "E1" at 68.6,0.6 h1.3
Bottom Overlay:
  drawing of 1034 lines, arcs and shapes, not listed
  text "STM32F407VxT6" at 46,30.3 h2.5
  text "2019.10.2" at 40.8,27.7 h2